# Allegro board Omni902.brd
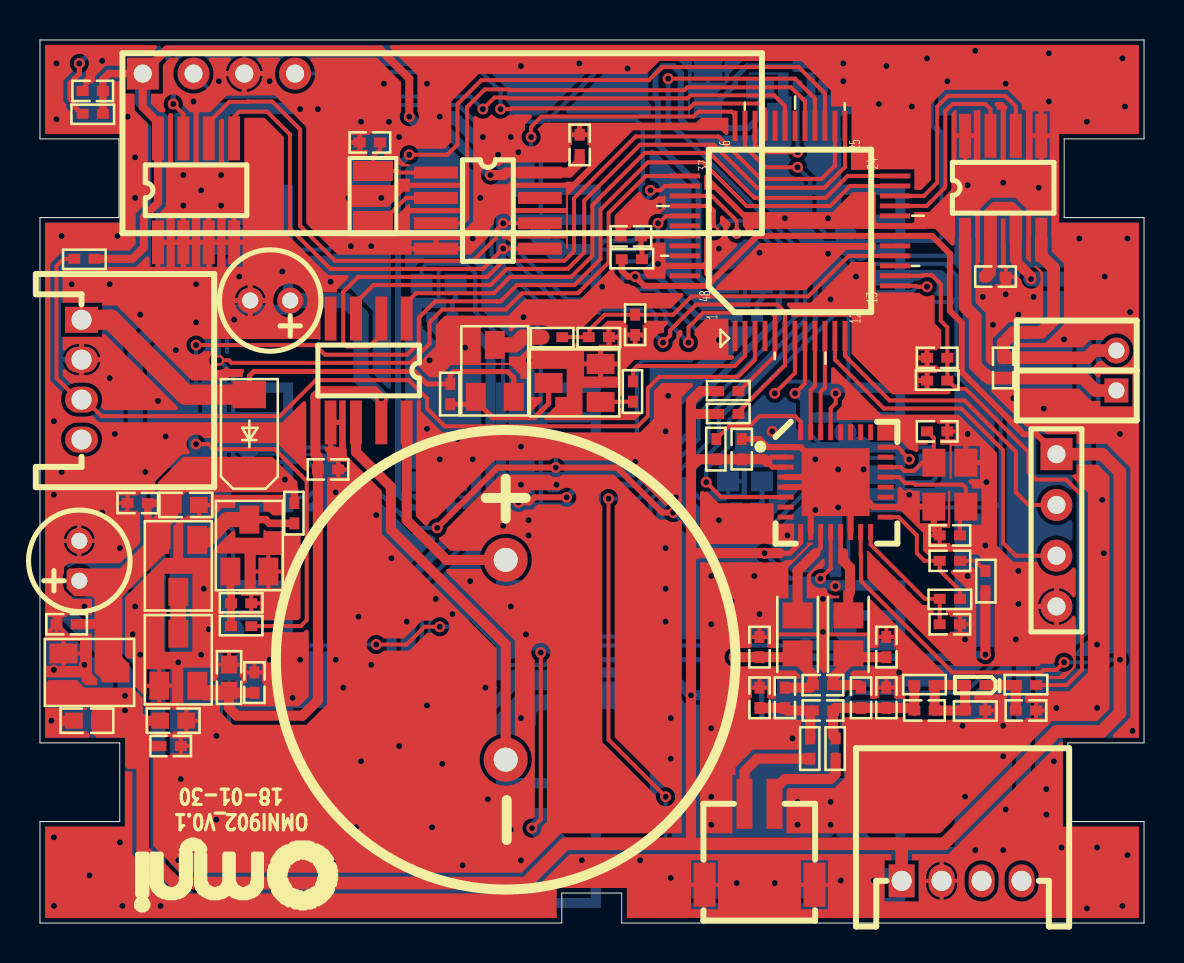
[diagram p0: board, top side]
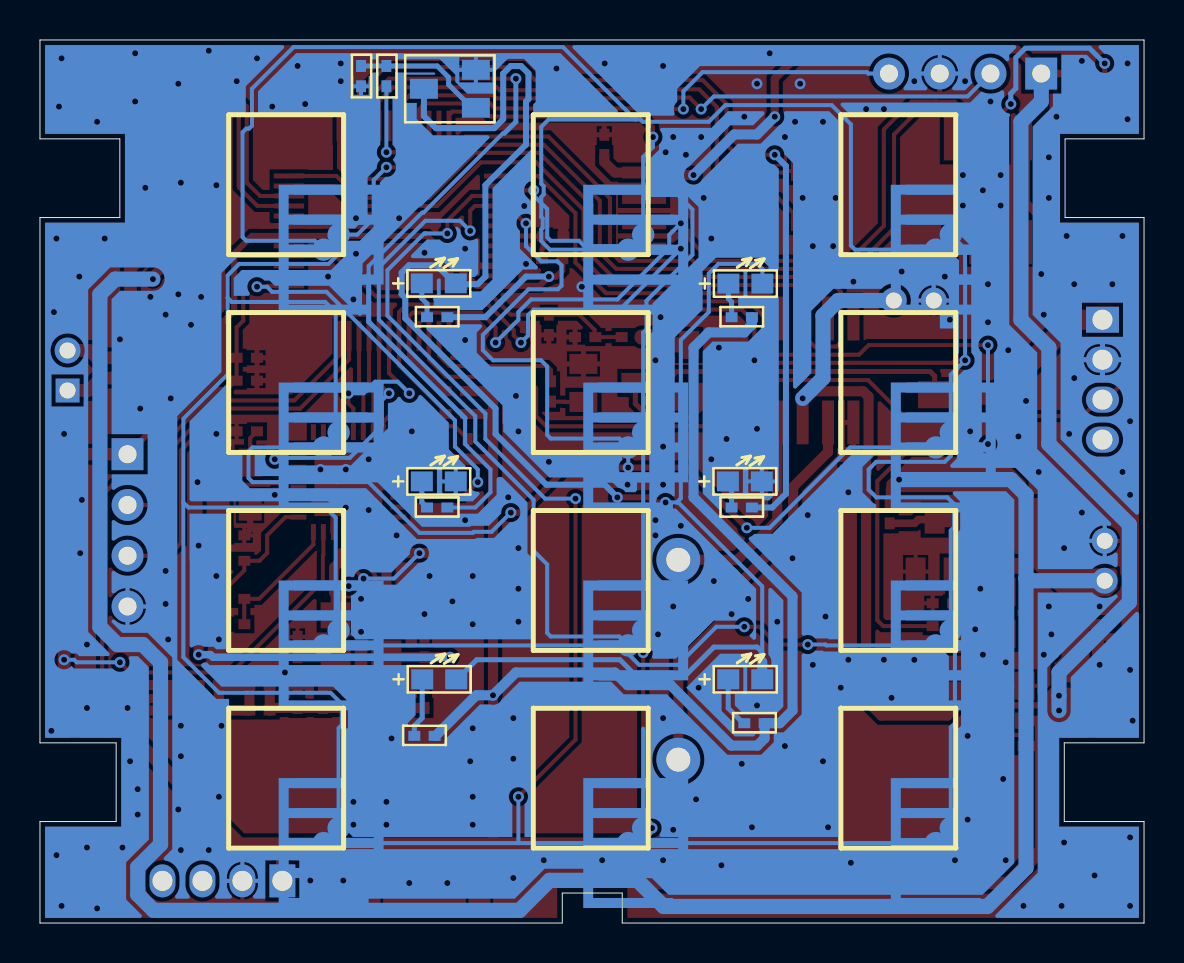
[diagram p1: board, bottom side, seen from below]

Outline 55.24 x 44.2 mm; copper layers: TOP, BOTTOM. Coordinates in mm from the lower left corner of the outline.
Outline path: 0,44.2 0,39.24 3.95,39.24 3.95,35.31 0,35.31 0,9.02 3.99,9.02 3.99,5.08 0,5.08 0,0 26.11,0 26.11,1.5 29.11,1.5 29.11,0 55.24,0 55.24,5.08 51.43,5.08 51.43,9.02 55.24,9.02 55.24,35.31 51.25,35.31 51.25,39.24 55.24,39.24 55.24,44.2 0,44.2

## Placement (name value [footprint] x y rotation side)
ANT1  470nH/LINE  [0805L]  37.91 14.45 270 top
ANT2  470nH/LINE  [0805L]  40.45 14.45 270 top
B1  Bar  [BAR]  23.3 18.18 270 top
C1  0.1uF  [0402C]  6.54 8.86 0 top
C2  100uF,  [CAP-2R0-5X11]  1.97 17.13 90 top
C3  0.1uF  [0402C]  1.33 14.95 180 top
C4  10uF  [0603C]  6.67 10.13 0 top
C5  10uF  [0603C]  2.35 10.13 180 top
C6  0.1uF  [0402C]  48.2 27.78 90 top
C7  0.1uF  [0402C]  47.82 32.35 0 top
C8  10uF  [0603C]  7.3 20.92 0 top
C9  0.1uF  [0402C]  4.89 21.02 180 top
C10  0.1uF  [0402C]  10.73 12.03 90 top
C11  10uF  [0603C]  9.46 12.29 90 top
C13  0.1uF  [0402C]  14.41 22.7 0 top
C14  100uF  [CAP-2R0-5X11]  12.52 31.16 180 top
C16  0.1uF  [0402C]  35.12 23.72 270 top
C21  1nF  [0402C]  45.53 18.13 180 top
C23  15pF  [0402C]  45.53 14.95 180 top
C25  65pF  [0402C]  37.27 11.27 90 top
C26  NC  [0402C]  36 13.81 270 top
C27  130pF  [0402C]  36 11.27 270 top
C29  227pF  [0402C]  39.18 11.91 180 top
C31  NC  [0402C]  39.18 10.64 180 top
C33  NC  [0402C]  42.35 13.81 90 top
C34  130pF  [0402C]  42.35 11.27 90 top
C36  65pF  [0402C]  41.08 11.27 90 top
C38  1nF  [0402C]  44.26 10.64 180 top
C39  NC  [0402C]  49.34 10.64 0 top
C40  10nF  [0402C]  44.89 28.29 180 top
C41  12p  [0402C]  45.53 19.4 0 top
C42  12p  [0402C]  44.89 24.61 180 top
C49  0.1uF  [0402C]  29.78 29.94 90 top
C50  0.1uF  [0402C]  2.64 41.64 180 top
C51  12pF  [0402C]  16.51 39.07 0 top
C52  0.1uF  [0402C]  27.01 38.95 90 top
C53  105  [0402C]  29.57 34.37 0 top
D1  SS34  [SMA]  10.48 24.48 90 top
D2  LED_B  [LED0603]  19.95 32 180 bottom
D3  LED_B  [LED0603]  35.29 32.01 180 bottom
D4  LED_B  [LED0603]  19.96 12.2 180 bottom
D5  LED_B  [LED0603]  35.27 12.2 180 bottom
D6  LED_B  [LED0603]  19.97 22.1 180 bottom
D7  LED_B  [LED0603]  35.29 22.1 180 bottom
D8  SS34  [0402D]  46.8 11.91 0 top
J1  CTI JTAG  [THC_4PC_2_00]  2.08 30.19 180 top
J2  SIP2  [THC-2PC-2R0]  53.86 27.65 90 top
J3  CON2_SMD_C  [SMD_2PC_1_50]  36.75 5.97 90 top
J6  CTI JTAG  [SIP-4-2R5]  50.86 23.46 270 top
J7  CTI JTAG  [THC_4PC_2_00]  43.12 2.11 270 top
K1  Key_B  [BZAJ_FZ]  41.05 23.8 90 bottom
K2  Key_B  [BZAJ_FZ]  41.05 13.9 90 bottom
K3  Key_B  [BZAJ_FZ]  41.05 4 90 bottom
K4  Key_B  [BZAJ_FZ]  41.05 33.7 90 bottom
K5  Key_B  [BZAJ_FZ]  25.81 23.8 90 bottom
K6  Key_B  [BZAJ_FZ]  25.81 13.9 90 bottom
K7  Key_B  [BZAJ_FZ]  25.81 4 90 bottom
K8  Key_B  [BZAJ_FZ]  25.81 33.7 90 bottom
K9  Key_B  [BZAJ_FZ]  10.42 23.8 90 bottom
K10  Key_B  [BZAJ_FZ]  10.42 13.9 90 bottom
K11  Key_B  [BZAJ_FZ]  10.42 4 90 bottom
K12  Key_B  [BZAJ_FZ]  10.42 33.7 90 bottom
M1  YET205A  [Y205A]  5.14 42.51 0 top
Q1  8050  [SOT23_W]  34.73 41.75 90 bottom
Q2  SI2305  [SOT23_W]  6.92 17.88 180 top
Q3  8050  [SOT23_W]  10.48 18.89 0 top
Q5  SI2305  [SOT23_W]  22.76 27.64 0 top
Q6  2N7002K  [SOT23_W]  26.75 27.03 90 top
R1  100  [0402R]  20.13 30.32 180 bottom
R2  100  [0402R]  35.37 30.32 180 bottom
R3  100  [0402R]  19.49 10 180 bottom
R4  100  [0402R]  36 9.37 180 bottom
R5  100  [0402R]  20.13 20.8 180 bottom
R6  100  [0402R]  35.37 20.8 180 bottom
R7  10k  [0402R]  37.91 42.39 270 bottom
R8  100k  [0402R]  39.18 42.39 270 bottom
R9  100k  [0402R]  12.73 20.51 90 top
R10  10k  [0402R]  10.07 14.86 0 top
R11  100k  [0402R]  10.07 16 0 top
R13  10k  [0402R]  33.85 23.72 90 top
R14  1.1K  [0402R]  45.53 16.22 180 top
R15  2.2K  [0402R]  47.31 17.11 270 top
R16  0R  [0402R]  38.54 8.73 90 top
R17  0R  [0402R]  39.81 8.73 90 top
R18  33K  [0402R]  44.26 11.91 0 top
R19  820R  [0402R]  49.34 11.91 0 top
R20  NC  [0402R]  46.8 10.64 180 top
R21  1.5K  [0402R]  44.89 27.15 0 top
R27  10k  [0402R]  25.63 29.32 180 top
R28  100k  [0402R]  20.53 26.47 90 top
R29  10k  [0402R]  29.67 26.6 90 top
R30  10k  [0402R]  27.96 29.32 180 top
R31  10k  [0402R]  2.64 40.5 180 top
R32  470R  [0402R]  29.62 33.22 0 top
R33  10k  [0402R]  34.44 26.62 0 top
R34  10k  [0402R]  34.44 25.48 0 top
R35  10k  [0402R]  2.22 33.24 180 top
U1  SC662K-3.3V  [SOT23_W]  2.48 12.54 270 top
U2  TC214B  [SO8-150]  48.2 36.8 0 top
U3  SC662K-3.3V  [SOT23_W]  6.92 13.18 0 top
U4  AK040G_SOP8  [SO8-150]  16.45 27.65 180 top
U5  NZ3801-A  [QFN32_5X5M]  37.31 23.82 0 top
U8  SN32F707B  [QFP48]  37.53 34.64 90 top
U9  AT24C64  [SO8-150]  7.81 36.67 0 top
U10  PCF8563_SOP8  [SO8-150]  22.42 35.66 270 top
X1  32768Hz  [CRY-32768-SMD]  16.66 35.14 180 top
Y1  27.12MHz  [OSC-4P-3R2X2R5-SMD]  45.53 21.94 90 top

## Library data of the parts
ANT1 ANT2 = IND_2.2uH_2.6A_10%_SMD
B1 = Bar
C1 C3 C9 C10 = CAP NP
C2 C14 = CAP_100UF_TANT_6.3V_3528-21
C4 C5 C8 C11 = C-np
C6 C7 C13 C50-C53 = CAP_0402_0.1uf_X5R_10V
C16 C21 C23 C25-C27 C29 C31 C33 C34 C36 C38-C42 C49 = CAP_0.001_X7R_50V_5%_0402
D1 D8 = SMA_SS34
D2-D7 = LED_LTST-C150GKT
J1 J6 J7 = HDR_4P
J2 = SIP2
J3 = CON2_SMD_C
K1-K12 = Key_B
M1 = YET205A
Q1 Q3 = 2N7002
Q2 Q5 = PMOS
Q6 = NMOS
R1-R11 R13-R21 R27-R35 = RES_10K_1/16W_1%_0402
U1 U3 = SC662K-3.3V
U2 = TC214B
U4 = AK040G_SOP8
U5 = NZ3801-AB
U8 = SN32F707B
U9 = AT24C64
U10 = PCF8563_SOP8
X1 = QZS32768
Y1 = xtal

## Footprints (pads in the part's own frame, mm; a bottom-side part is the same pattern mirrored in y, then rotated)
0402C
  rect 0.6x0.5 smd: 1(-0.508,0) 2(0.508,0)
0402D
  rect 0.6x0.5 smd: 1(-0.508,0) 2(0.508,0)
0402R
  rect 0.6x0.5 smd: 1(-0.508,0) 2(0.508,0)
0603C
  rect 0.89x0.81 smd: 1(-0.65,0) 2(0.65,0)
0805L
  rect 1.3x1.5 smd: 1(-0.95,0) 2(0.95,0)
BAR
  round 2.2 hole 1.2: 1(0,0) 2(10,0)
BZAJ_FZ
  custom 6.5x4.5 smd: 1(0,0)
  custom 5x4.5 smd: 2(0.75,-0.75)
CAP-2R0-5X11
  round 1.3 hole 0.8: 1(0,0) 2(2,0)
CRY-32768-SMD
  rect 2x1 smd: 1(0,0) 2(0,-2.5)
LED0603
  rect 1.1x1 smd: 1(-0.85,0) 2(0.85,0)
OSC-4P-3R2X2R5-SMD
  rect 1.4x1.15 smd: 1(-1.1,-0.8) 2(1.1,-0.8) 3(1.1,0.8) 4(-1.1,0.8)
QFN32_5X5M
  rect 0.8x0.25 smd: 1(0,0) 2(0,-0.5) 3(0,-1) 4(0,-1.5) 5(0,-2) 6(0,-2.5) 7(0,-3) 8(0,-3.5) 17(5,-3.5) 18(5,-3) 19(5,-2.5) 20(5,-2) 21(5,-1.5) 22(5,-1) 23(5,-0.5) 24(5,0)
  rect 0.25x0.8 smd: 9(0.75,-4.25) 10(1.25,-4.25) 11(1.75,-4.25) 12(2.25,-4.25) 13(2.75,-4.25) 14(3.25,-4.25) 15(3.75,-4.25) 16(4.25,-4.25) 25(4.25,0.75) 26(3.75,0.75) 27(3.25,0.75) 28(2.75,0.75) 29(2.25,0.75) 30(1.75,0.75) 31(1.25,0.75) 32(0.75,0.75)
  rect 3.4x3.4 smd: 33(2.5,-1.75)
QFP48
  rect 1.52x0.25 smd: 1(-5.26,2.75) 2(-5.26,2.25) 3(-5.26,1.75) 4(-5.26,1.25) 5(-5.26,0.75) 6(-5.26,0.25) 7(-5.26,-0.25) 8(-5.26,-0.75) 9(-5.26,-1.25) 10(-5.26,-1.75) 11(-5.26,-2.25) 12(-5.26,-2.75) 25(5.26,-2.75) 26(5.26,-2.25) 27(5.26,-1.75) 28(5.26,-1.25) 29(5.26,-0.75) 30(5.26,-0.25) 31(5.26,0.25) 32(5.26,0.75) 33(5.26,1.25) 34(5.26,1.75) 35(5.26,2.25) 36(5.26,2.75)
  rect 0.25x1.52 smd: 13(-2.75,-5.26) 14(-2.25,-5.26) 15(-1.75,-5.26) 16(-1.25,-5.26) 17(-0.75,-5.26) 18(-0.25,-5.26) 19(0.25,-5.26) 20(0.75,-5.26) 21(1.25,-5.26) 22(1.75,-5.26) 23(2.25,-5.26) 24(2.75,-5.26) 37(2.75,5.26) 38(2.25,5.26) 39(1.75,5.26) 40(1.25,5.26) 41(0.75,5.26) 42(0.25,5.26) 43(-0.25,5.26) 44(-0.75,5.26) 45(-1.25,5.26) 46(-1.75,5.26) 47(-2.25,5.26) 48(-2.75,5.26)
SIP-4-2R5
  rect 1.6x1.6 hole 0.9: 1(0,0)
  round 1.6 hole 0.9: 2(2.54,0) 3(5.08,0) 4(7.62,0)
SMA
  rect 1.36x1.67 smd: 1(1.965,0) 2(-1.965,0)
SMD_2PC_1_50
  rect 2.5x0.8 smd: 1(0,0) 2(0,1.5)
  rect 2.2x1.1 smd: 3(-4.05,-2) 4(-4.05,3.5)
SO8-150
  rect 0.6x2.2 smd: 1(-1.905,-2.6) 2(-0.635,-2.6) 3(0.635,-2.6) 4(1.905,-2.6) 5(1.905,2.6) 6(0.635,2.6) 7(-0.635,2.6) 8(-1.905,2.6)
SOT23_W
  rect 1x1.4 smd: 1(-0.95,-1.3) 2(0.95,-1.3) 3(0,1.3)
THC-2PC-2R0
  rect 1.2x1.2 hole 0.8: 1(-1,0)
  round 1.3 hole 0.8: 2(1,0)
THC_4PC_2_00
  rect 1.65x1.3 hole 1: 1(0,0)
  oval 1.65x1.3 hole 1: 2(0,2) 3(0,4) 4(0,6)
Y205A
  rect 1.6x1.6 hole 0.9: 1(0,0)
  round 1.6 hole 0.9: 2(2.54,0) 3(5.08,0) 4(7.62,0)

## Nets
3V3_VC: C10.1 C11.1 C13.1 C14.1 U3.2(OUT) U4.7(VDD)
+3.3V: C1.1 C4.1 C5.1 C16.2 C50.1 C52.1 J6.1 J7.1 M1.1(VCC) R1.2 R2.2 R3.2 R4.2 R13.1 R31.1 R32.1 R33.1 R34.1 R35.1 U1.2(OUT) U5.2(PVDD) U5.3(DVDD) U5.9(SVDD) U5.12(TVDD) U5.15(AVDD) U8.18(AVDD) U8.48(VDD) U9.8(VCC) U10.8(VDD)
GND: C1.2 C2.2 C3.2 C4.2 C5.2 C7.2 C8.2 C9.2 C10.2 C11.2 C13.2 C14.2 C16.1 C23.1 C26.1 C27.1 C33.2 C34.2 C39.2 C40.2 C41.1 C42.1 C49.1 C50.2 C51.1 C52.2 C53.1 D6.2(K) D7.2(K) J1.2 J3.3 J3.4 J6.4 J7.2 M1.3(GND) Q1.2(SOURCE) Q3.2(SOURCE) Q6.2(SOURCE) R8.2 R11.2 R20.1 R21.1 R30.1 U1.1(GND) U2.5(GND1) U2.8(GND2) U3.1(GND) U4.5(VSS) U5.1(I2C) U5.4(DVSS) U5.5(PVSS) U5.10(TVSS1) U5.14(TVSS2) U5.18(AVSS) U5.33(GND) U8.19(AVSS) U8.46(VSS) U9.1(A0) U9.2(A1) U9.3(A2) U9.4(VSS) U10.4(VSS) Y1.2 Y1.4
VBAT: D1.1 J1.1 Q5.2(SOURCE) R28.2
VCC: C2.1 C3.1 C7.1 C8.1 C9.1 D1.2 Q2.2(SOURCE) R9.2 U1.3(VDD) U2.2(VCC1) U2.3(VCC2)
13.56MH+: J3.2 R16.1
13.56MH-: J3.1 R17.1
BACKLIGHTCTR: R7.2 U8.34(P1.9/CT16B1_PWM0)
BAR_N: B1.2 U4.6(PWM1)
BAR_P: B1.1 U4.8(PWM2)
BAT_VAL: C49.2 R27.1 R30.2 U8.16(P2.3/AIN3/CM1N)
BAVO: R29.2 U8.2(P0.1/UTXD1)
H1: K4.1 K8.1 K12.1 U8.38(P3.1)
H2: K3.1 K7.1 K11.1 U8.39(P3.2)
H3: K2.1 K6.1 K10.1 U8.40(P3.3)
H4: K1.1 K5.1 K9.1 U8.41(P3.4/LXTALIN)
IIC_SCL: R33.2 U8.5(P0.4/SCL0) U9.6(SCL) U10.6(SCL)
IIC_SDA: R34.2 U8.6(P0.5/SDA0) U9.5(SDA) U10.5(SDA)
L1: K1.2 K2.2 K3.2 K4.2 U8.35(P1.10/CT16B1_PWM1)
L2: K5.2 K6.2 K7.2 K8.2 U8.36(P1.11/CLKOUT)
L3: K9.2 K10.2 K11.2 K12.2 U8.37(P3.0)
LEDG: R6.2 U8.28(P1.3/CT16B2_PWM1N)
LEDR: R5.2 U8.27(P1.2/CT16B2_PWM1)
MMCU_UP: U8.30(P1.5)
MOTOL: U2.6(INA) U8.22(P2.7/AIN7)
MOTOR: U2.7(INB) U8.21(P2.6/AIN6)
P0.0: U8.1(P0.0/URXD1)
P1.4: U8.29(P1.4/CT16B2_CAP0/DPDWAKEUP) U10.3(INT)
P2.4: U8.17(P2.4/AIN4/CM1P)
P2.5: U8.20(P2.5/AIN5)
P3.5: U8.42(P3.5/LXALOUT)
P3.6: C53.2 R32.2 U8.43(P3.6/RESET)
P3.7: U8.44(P3.7/XTALIN)
P3.8: U8.45(P3.8/XTALOUT)
P3.9: U8.47(P3.9/CT16B2_PWM3N/CM1O)
RCARD_ADCN: C40.1 R19.2 R21.2 U8.14(P2.1/AIN1/CM0N)
RCARD_ADCO: U8.4(P0.3/CT16B2_PWM2N/CM0O)
RCARD_ADCP: U8.15(P2.2/AIN2/CM0P)
RCARD_CS: U5.24(SDA/NSS/URX) U8.8(P0.7/SEL0)
RCARD_RST: U5.6(NRSTPD) U8.13(P2.0/AIN0)
RF_PWR: J7.3 M1.4(CE) U8.33(P1.8/CT16B1_CAP0)
RF_TX: J7.4 M1.2(DO) U8.31(P1.6/URXD0/CT16B2_PWM2)
SET_KEY: J1.3 R35.2 U8.3(P0.2/CT16B0_CAP0)
SPI_MISO: U5.31(D7/MISO/SCL/UTX) U8.9(P0.8/MISO0/CT16B0_PWM0)
SPI_MOSI: U5.30(D6/MOSI/ADR0/MX) U8.10(P0.9/MOSI0/CT16B0_PWM1)
SPI_SCK: U5.29(D5/SCK/ADR1/DTRQ) U8.7(P0.6/SCK0)
SWCLK: J6.3 U8.11(P0.10/SWCLK/CT16B0_PWM2)
SWDIO: J6.2 U8.12(P0.11/SWDIO)
UTXD0: U8.32(P1.7/UTXD0/CT16B2_PWM3)
VC_BS_SIG: U4.3(TG3) U8.25(P1.0/CT16B2_PWM0N)
VC_CT_RST: U4.2(TG1) U8.26(P1.1/CT16B2_PWM0)
VC_CT_SIG: U4.1(TG2/RST) U8.24(P2.9/AIN9)
VOC_BAT: Q2.3(DRAIN) U3.3(VDD)
VOC_PWR_ON: R10.2 U8.23(P2.8/AIN8)
N452386: C38.1 D8.1 R18.2 R20.2
N452418: C31.1 C34.1 C36.1 C38.2 R17.2 R18.1
N452474: C39.1 D8.2 R19.1
N452564: ANT2.2 C29.1 C33.1 C36.2
N452690: C41.2 U5.21(OSCIN) Y1.1
N452714: C42.2 U5.22(OSCOUT) Y1.3
N453184: C21.2 R14.1 U5.17(RX)
N453208: C21.1 R15.1
N453216: C23.2 R14.2 U5.16(VMID)
N453232: ANT1.2 C25.2 C26.2 C29.2 R15.2
N453248: ANT1.1 U5.11(TX1)
N453252: C25.1 C27.2 C31.2 R16.2
N453288: ANT2.1 U5.13(TX2)
N458659: D4.1(A) R3.1
N458663: D3.1(A) R2.1
N458667: D2.1(A) R1.1
N458671: D2.2(K) D3.2(K) D4.2(K) D5.2(K) Q1.3(DRAIN)
N458703: D5.1(A) R4.1
N554836: Q5.1(GATE) Q6.3(DRAIN) R28.1
N554996: Q6.1(GATE) R29.1
N555000: Q5.3(DRAIN) R27.2
N555502: C6.2 J2.2 U2.4(OUTB)
N555506: C6.1 J2.1 U2.1(OUTA)
N555509: Q2.1(GATE) Q3.3(DRAIN) R9.1
N555513: Q3.1(GATE) R10.1 R11.1
N555834: Q1.1(GATE) R7.1 R8.1
N556154: D6.1(A) R5.1
N556230: D7.1(A) R6.1
N556926: R13.2 U5.32(EA)
N559129: C51.2 U10.1(OSCI) X1.2
N559153: U10.2(OSCO) X1.1
N566757: R31.2 U9.7(W\P\)
N569547: J1.4

Pads without a net: U4 4; U5 7 8 19 20 23 25 26 27 28; U10 7

## Via types
v1: diameter 0.55, hole 0.3, TOP to BOTTOM, 290 vias

## Routing (per net, layer and track width the routed paths; a pad name or vN(x,y) marks a point on that pad's centre or on a via; arc(x,y) is an arc through that point)
3V3_VC: length 37.3
  TOP w0.508: 10.73,11.53 9.57,11.53 C11.1 9.46,10.76 9.84,10.38 13.14,10.38 13.91,11.14 C13.1 13.91,23.33 13.78,23.45 13.78,26.34 14.05,26.61 16.73,26.61 v1(17.08,26.26) U4.7
  TOP w0.762: C11.1 9.35,11.53 8.22,11.53 U3.2
  BOTTOM w0.762: C14.1 15.3,31.16 16.07,30.39 16.07,27.27 v1(17.08,26.26)
+3.3V: length 301.7
  TOP w0.203: U5.15 41.06,18.43 41.09,18.41 41.09,17.11 45.66,12.54 50.1,12.54 50.22,12.67 50.86,12.67 v1(51.24,13.05) ; v1(39.05,17.24) 39.56,17.75 U5.12
  TOP w0.254: 37.02,18.51 37.53,18.51 38.06,19.05 U5.9 ; U5.2 36.62,23.32 36.39,23.08 36.65,22.82 U5.3
  TOP w0.305: J6.1 49.87,24.46 49.23,24.46 46.13,27.57 46.13,30.04 45.53,30.64 45.53,33.5 44.64,34.39 U8.18 35.88,34.39 33.38,31.89 U8.48 30.25,31.89 v1(29.78,32.35) 29.41,32.35 29.11,32.66 R32.1
  TOP w0.381: R31.1 C50.1 3.15,42.21 3.45,42.51 M1.1
  TOP w0.406: R35.1 4.64,33.24 5.2,33.81 5.2,35.34 5.91,36.05 5.91,40.07 5.14,40.83 M1.1 6.35,43.72 17.02,43.72 18.48,42.26 v1(18.48,40.35)
  TOP w0.508: 32.45,3.97 32.58,4.1 v1(32.58,11.4) 32.58,18.26 ; C52.1 27.01,38.09 26.48,37.56 U10.8 23.33,37.56 23.2,37.43 v1(22.54,37.43) ; 37.02,18.51 v1(36.26,18.51) 32.83,18.51 32.58,18.26 ; 32.58,25.37 32.58,22.83 ; 32.58,25.37 32.58,26.13 33.06,26.62 R33.1 ; 32.58,25.37 32.68,25.48 R34.1 ; 32.58,22.83 32.58,18.26 ; 32.58,22.83 32.96,23.21 R13.1 C16.2 36.26,23.21 36.39,23.08 ; C1.1 5.27,8.86 ; C4.1 5.14,10.13
  TOP w0.635: 42.86,3.97 26.29,3.97 24.32,2 6.79,2 5.14,3.65 5.14,10.13 ; 42.86,3.97 43.12,3.72 J7.1 ; 42.86,3.97 45.24,3.97 50.86,9.59 53.12,9.59 54.04,10.51 v1(54.04,13.18) 54.04,22.57 53.15,23.46 J6.1
  BOTTOM w0.203: v1(36.26,18.51) 37.53,17.24 v1(39.05,17.24) ; v1(54.04,13.18) 53.53,13.18 53.41,13.05 v1(51.24,13.05)
  BOTTOM w0.305: v1(29.78,32.35) 30.92,32.35 32.96,30.32 R2.2
  BOTTOM w0.508: R1.2 19.62,29.94 20,29.56 21.78,29.56 22.54,28.8 22.54,21.3 17.59,16.35 17.59,10.64 18.22,10 R3.2 18.99,9.24 19.35,8.88 20.66,8.88 23.69,11.91 25.84,11.91 26.48,12.54 31.43,12.54 v1(32.58,11.4) 33.41,11.4 35.45,9.37 R4.2 ; v1(22.54,37.43) 20.51,39.47 19.37,39.47 v1(18.48,40.35) ; 43.12,2.29 J7.1
  BOTTOM w0.762: M1.1 5.14,41.12 6.16,40.1 6.16,30.19 4.76,28.8 4.76,23.97 0.73,19.94 0.73,16.06 4.25,12.54 v1(4.25,11.38) v1(4.25,10.64)
GND: length 164.1
  TOP w0.203: 2.48,42.13 2.13,41.79 C50.2 ; 48.32,32.78 C7.2 48.8,32.35 ; 0.83,14.53 C3.2 ; C3.2 0.44,14.57 ; C3.2 0.83,15.08 ; C3.2 1.21,14.57 ; C39.2 49.85,11.06 ; C39.2 49.85,10.21 ; C39.2 50.33,10.64 ; 0.83,15.21 0.83,15.38 ; 0.83,15.21 0.57,15.46 ; 0.83,15.21 0.83,15.08 ; Q3.2 11.43,18.47 ; Q3.2 11.43,16.71 ; Q3.2 12.11,17.59 ; Q3.2 10.75,17.59 ; C11.2 10.04,12.94 ; C11.2 8.88,12.94 ; C11.2 9.46,13.56 ; 41.93,14.32 C33.2 ; C33.2 42.78,14.32 ; C33.2 42.35,14.8 ; 7.05,8.43 C1.2 ; C1.2 7.53,8.86 ; C1.2 7.05,9.29 ; C27.1 36,12.26 ; C27.1 36.43,11.78 ; C27.1 35.58,11.78 ; C4.2 7.94,10.13 ; C4.2 7.32,9.55 ; C4.2 7.32,10.71 ; C34.2 42.78,11.78 ; C34.2 42.35,12.26 ; C34.2 41.93,11.78 ; 38.03,1.92 J3.3 ; J3.3 38.75,0.64 ; J3.3 39.48,1.92 ; J3.3 38.75,3.19 ; R20.1 47.79,10.64 ; R20.1 47.31,11.06 ; R20.1 47.31,10.21 ; U3.1 6.65,11.88 ; U3.1 5.29,11.88 ; U3.1 5.97,11 ; U3.1 5.97,12.75 ; U1.1 2.05,13.49 ; U1.1 1.18,12.81 ; U1.1 1.18,14.17 ; J3.4 33.98,1.92 ; J3.4 33.25,3.19 ; J3.4 33.25,0.64 ; J3.4 32.53,1.92 ; J7.2 45.12,3.11 ; J7.2 45.12,1.11 ; J7.2 45.94,2.11 ; J7.2 44.29,2.11 ; C41.1 45.02,19.83 ; C41.1 45.02,18.97 ; C41.1 44.54,19.4 ; 14.92,22.27 C13.2 ; C13.2 14.92,23.13 ; C13.2 15.4,22.7 ; R11.2 11.05,16 ; R11.2 10.57,15.57 ; R11.2 10.57,16.43 ; 41.72,20.82 41.65,20.82 40.66,21.81 40.07,21.81 ; 8.58,20.92 C8.2 7.95,20.34 ; 10.3,12.54 C10.2 ; C10.2 11.16,12.54 ; C10.2 10.73,13.02 ; C42.1 45.88,24.61 ; C42.1 45.4,25.03 ; C42.1 45.4,24.18 ; 46.04,14.53 C23.1 ; C23.1 46.52,14.95 ; C23.1 46.04,15.38 ; 0.83,15.08 1.08,15.34 ; 35.58,14.32 C26.1 ; C26.1 36,14.8 ; C26.1 36.43,14.32 ; C2.2 3.22,19.13 3.24,19.15 ; C2.2 1.14,19.13 ; C2.2 1.97,19.96 ; C2.2 1.97,18.13 ; 39.23,21.48 39.17,21.43 38.97,21.43 38.56,21.02 ; C9.2 4.39,21.45 ; C9.2 4.39,20.59 ; C9.2 3.91,21.02
  TOP w0.254: U10.4 18.54,33.75 ; U10.4 21.09,33.75 ; U10.4 19.82,34.23 ; M1.3 9.08,42.51 ; M1.3 11.24,42.51 11.37,42.64 ; M1.3 10.22,41.54 ; 50.1,39.4 50.1,38.12 ; 50.1,39.4 50.58,39.4 ; 50.1,39.4 50.1,40.68 ; 50.1,39.4 49.62,39.4 ; R30.1 28.47,29.75 ; R30.1 28.47,28.9 ; R30.1 28.95,29.32 ; 8.45,34.07 8.45,35.35 ; 8.45,34.07 8.92,34.07 ; 8.45,34.07 8.45,32.61 ; 8.45,34.07 7.97,34.07 ; C49.1 30.21,29.43 ; C49.1 29.35,29.43 ; C49.1 29.78,28.95 ; U2.8 46.77,39.4 ; U2.8 46.29,38.12 ; U2.8 45.81,39.4 ; C40.2 44.39,28.72 ; C40.2 43.91,28.29 ; C40.2 44.39,27.86 ; 7.18,35.53 U9.2 ; U9.2 7.18,32.61 ; U9.2 7.65,34.07 ; U9.2 6.47,34.07 ; C51.1 15.52,39.07 ; C51.1 16,39.49 ; C51.1 16,38.64 ; U9.4 10.19,34.07 ; U9.4 9.72,32.79 ; U9.4 9.72,35.35 ; U9.4 9.24,34.07 ; C14.2 9.69,31.16 ; C14.2 11.35,31.16 ; C14.2 10.52,31.98 ; C14.2 10.52,30.33 ; R21.1 44.39,26.72 ; R21.1 43.91,27.15 ; R21.1 44.39,27.57 ; 50.86,15.84 50.86,16.82 ; 50.86,15.84 49.89,15.84 ; 50.86,15.84 50.86,14.87 ; Q6.2 28.05,27.3 ; Q6.2 28.05,28.66 ; Q6.2 28.93,27.98 ; Q6.2 27.17,27.98 ; 15.02,25.05 U4.5 14.54,23.78 ; 27.5,39.47 27.48,39.45 C52.2 ; C52.2 27.01,39.93 ; C52.2 26.58,39.45 ; 46.33,23.92 Y1.2 47.08,23.04 ; 6.47,34.07 5.91,34.07 5.91,32.35 ; 6.47,34.07 6.54,34 ; J1.2 2.08,27.37 ; J1.2 2.08,29.02 ; J1.2 3.08,28.19 ; 41.6,34.89 41.59,34.89
  TOP w0.279: 41.21,34.89 41.22,34.89 U8.19 44.26,34.89 44.26,34.89
  TOP w0.305: 39.56,22.32 U5.33 ; 39.56,22.32 39.35,22.53 39.35,23.19 39.03,23.51 38.37,23.51 38.07,23.81 37.79,23.81 37.79,23.82 U5.1 36.41,23.82 36,24.23 35.12,24.23 ; 39.56,22.32 U5.4 ; U5.33 40.02,21.86 ; U5.33 39.56,21.82 ; 40.02,21.86 40.56,21.32 U5.14 ; 40.02,21.86 40.68,21.86 41.72,20.82 U5.18 43.85,20.82 43.87,20.84 Y1.4 44.73,19.69 C41.1 ; 39.56,21.82 39.23,21.48 38.95,21.48 38.56,21.09 U5.10 ; 39.56,21.82 U5.5 ; v1(30.92,32.99) 31.02,32.89 U8.46 33.24,32.89 33.34,32.99
  TOP w0.508: C5.2 v1(0.57,10.13) ; v1(31.01,35.89) 29.89,35.89 29.06,35.06 C53.1 ; C7.2 v1(48.32,31.46)
  BOTTOM w0.203: M1.3 11.2,42.51 ; M1.3 10.22,43.49 ; M1.3 9.25,42.51 ; D7.2 35.16,22.1 ; D7.2 34.44,21.42 ; D7.2 34.44,22.78 ; 32.56,42.7 Q1.2 ; Q1.2 34.31,42.7 ; Q1.2 33.43,43.38 ; Q1.2 33.43,42.02 ; D6.2 19.85,22.1 ; D6.2 19.12,21.42 ; D6.2 18.4,22.1 ; D6.2 19.12,22.78 ; C14.2 10.52,31.98 ; C14.2 11.35,31.16 ; C14.2 9.69,31.16 ; 44.29,2.11 J7.2 ; J7.2 45.94,2.11 ; J7.2 45.12,3.11 ; C2.2 1.97,19.96 ; C2.2 2.8,19.13 ; C2.2 1.97,18.3 ; 39.18,41.4 R8.2 ; R8.2 39.61,41.88 ; R8.2 38.75,41.88 ; 50.86,14.87 50.86,15.84 ; 50.86,15.84 50.86,16.82 ; 50.86,15.84 49.89,15.84
  BOTTOM w0.254: J1.2 2.08,27.37 ; J1.2 3.08,28.19 ; J1.2 2.08,29.02 ; J1.2 1.08,28.19
  vias: v1(0.7,25.11) v1(0.7,21.43) v1(0.7,12.67) v1(0.7,4.29) v1(0.7,0.86) v1(0.83,43.02) v1(0.83,40.23) v1(1.08,34.39) v1(1.08,22.57) v1(1.59,31.97) v1(2.22,15.84) v1(2.22,12.92) v1(2.48,2.38) v1(3.11,43.15) v1(3.11,20.54) v1(3.49,31.97) v1(3.49,27.27) v1(3.75,24.48) v1(3.87,34.39) v1(4,18.76) v1(4,4.03) v1(4.13,0.86) v1(4.38,40.35) v1(4.64,14.45) v1(4.76,38.32) v1(4.76,36.29) v1(4.76,15.84) v1(5.02,30.45) v1(5.02,13.43) v1(5.14,32.48) v1(5.27,22.57) v1(5.91,26.13) v1(6.03,0.86) v1(6.29,24.35) v1(6.79,28.67) v1(6.92,13.05) v1(6.92,3.14) v1(7.05,7.21) v1(7.18,37.43) v1(7.18,35.91) v1(7.68,41.12) v1(7.81,31.97) v1(7.81,30.07) v1(8.06,36.67) v1(8.06,13.43) v1(8.19,16.73) v1(8.45,14.7) v1(8.7,24.61) v1(8.83,9.37) v1(8.83,5.18) v1(8.95,42.13) v1(9.06,37.43) v1(9.06,35.91) v1(9.46,3.14) v1(9.72,30.19) v1(9.97,32.35) v1(11.49,42.13) v1(11.49,13.18) v1(12.13,32.61) v1(12.64,11.27) v1(13.02,40.74) v1(13.02,13.18) v1(13.91,40.74) v1(14.54,32.1) v1(14.67,3.02) v1(14.8,21.56) v1(14.8,13.18) v1(15.18,11.78) v1(15.43,36.29) v1(15.56,33.88) v1(15.81,4.79) v1(15.94,15.34) v1(16.07,40.1) v1(16.07,8.1) v1(16.57,33.88) v1(16.57,12.92) v1(16.83,20.42) v1(17.08,36.29) v1(17.21,42.01) v1(17.46,40.1) v1(17.59,18.26) v1(17.97,39.34) v1(17.97,8.86) v1(18.35,15.08) v1(18.73,43.53) v1(19.37,42.01) v1(19.37,24.73) v1(19.37,10.89) v1(19.49,28.16) v1(19.62,4.79) v1(19.81,16.22) v1(20,40.35) v1(20,23.21) v1(20.13,7.97) v1(20.64,15.46) v1(20.89,24.23) v1(21.15,2.89) v1(21.27,28.8) v1(21.53,17.11) v1(21.65,34.26) v1(21.65,23.21) v1(22.03,36.29) v1(22.16,39.34) v1(22.29,11.78) v1(22.42,6.19) v1(22.92,38.45) v1(23.18,19.88) v1(23.56,39.34) v1(23.56,15.84) v1(23.56,4.67) v1(23.94,38.58) v1(24.07,42.89) v1(24.07,23.84) v1(24.07,21.94) v1(24.07,10.26) v1(24.07,3.14) v1(24.19,30.32) v1(24.32,14.45) v1(24.45,28.16) v1(24.45,20.16) v1(24.45,19.4) v1(25.84,21.94) v1(26.99,43.02) v1(27.11,3.14) v1(28.13,31.85) v1(29.4,42.77) v1(29.78,23.08) v1(30.04,3.14) v1(31.31,24.61) v1(31.31,18.76) v1(31.31,16.73) v1(31.31,15.08) v1(31.43,26.38) v1(31.56,10.26) v1(31.56,8.22) v1(31.56,2.25) v1(31.81,21.3) v1(33.59,17.37) v1(33.59,14.95) v1(33.59,9.75) v1(33.59,6.32) v1(33.59,4.92) v1(33.72,8.1) v1(33.97,33.75) v1(33.97,29.18) v1(33.97,20.16) v1(34.61,16.1) v1(34.86,2) v1(35.75,17.37) v1(36,33.55) v1(36,15.46) v1(36.64,24.61) v1(36.77,2) v1(37.27,35.27) v1(37.4,19.4) v1(37.66,9.24) v1(37.91,6.06) v1(37.91,4.92) v1(38.8,23.21) v1(38.8,20.67) v1(39.18,16.22) v1(39.18,14.57) v1(39.43,35.27) v1(39.43,33.5) v1(39.56,31.21) v1(39.56,6.06) v1(39.56,4.92) v1(39.94,22.7) v1(39.94,20.8) v1(40.07,2.13) v1(40.2,43.02) v1(40.2,42.13) v1(40.83,32.35) v1(41.21,22.7) v1(41.72,2.13) v1(41.97,40.99) v1(42.35,42.89) v1(42.99,12.54) v1(43.5,21.43) v1(43.62,40.86) v1(44.39,43.28) v1(45.4,42.13) v1(46.16,9.87) v1(46.29,14.19) v1(46.29,6.32) v1(46.42,36.93) v1(46.42,24.48) v1(46.42,17.37) v1(46.8,43.66) v1(46.8,3.65) v1(47.18,31.34) v1(47.36,22.07) v1(47.31,18.89) v1(47.69,29.94) v1(48.2,37.05) v1(48.2,9.87) v1(48.2,8.35) v1(48.2,3.65) v1(48.32,42.01) v1(48.32,5.68) v1(48.7,26.26) v1(48.83,14.19) v1(48.96,30.45) v1(48.96,17.62) v1(48.96,15.97) v1(49.72,31.34) v1(49.97,36.8) v1(50.23,25.75) v1(50.36,6.7) v1(50.36,5.43) v1(50.48,43.53) v1(50.48,41.12) v1(50.74,8.1) v1(50.86,10.76) v1(51.12,3.78) v1(51.24,29.21) v1(52.01,34.26) v1(52.39,40.1) v1(52.39,0.73) v1(52.9,13.94) v1(52.9,10.76) v1(52.9,3.78) v1(53.15,21.18) v1(53.23,18.51) v1(53.28,32.35) v1(54.04,24.48) v1(54.17,43.28) v1(54.17,0.86) v1(54.29,40.86) v1(54.42,34.26) v1(54.42,3.4) v1(54.55,30.58) v1(54.67,9.62)
VBAT: length 26.1
  TOP w0.254: Q5.2 23.71,27.29 23.4,27.6 20.71,27.6 20.53,27.42 R28.2 19.35,26.98 18.73,27.6 10.7,27.6 10.48,27.38 D1.1
  TOP w1.016: J1.1 3.54,30.19 7.29,26.44 D1.1
VCC: length 124.5
  TOP w0.381: 5.4,19.91 5.4,19.91 C9.1 6.56,21.02 C8.1 ; 12.51,21.94 12.73,21.72 R9.2
  TOP w0.508: U2.3 48.83,33.12 49.59,32.35 v1(49.59,32.23) ; C3.1 2.98,14.95
  TOP w0.635: U2.3 48.83,35.53 48.58,35.78 47.82,35.78 47.56,35.53 47.56,32.88 47.5,32.82 47.5,32.55 C7.1
  BOTTOM w0.762: 5.91,17.24 5.79,17.13 C2.1 ; 5.91,17.24 5.91,21.43 6.67,22.19 v1(12.26,22.19) ; 5.91,17.24 5.91,2.76 7.84,0.83 24.04,0.83 25.34,2.13 29.75,2.13 31.24,0.63 49.56,0.63 50.35,1.43 50.35,2.8 49.21,3.94 49.21,13.05 50.1,13.94 51.37,13.94 52.25,14.81 52.25,31.46 51.49,32.23 v1(49.59,32.23)
13.56MH+: length 5.2
  TOP w0.508: J3.2 35.25,7.6 35.88,8.22 R16.1
13.56MH-: length 4.9
  TOP w0.508: J3.1 36.75,6.69 37.27,7.21 39.56,7.21 39.81,7.46 R17.1
BACKLIGHTCTR: length 6.6
  TOP w0.203: U8.34 35.78,38.93 36.13,38.58 v1(37.91,38.58)
  BOTTOM w0.203: v1(37.91,38.58) R7.2
BAR_N: length 20
  TOP w0.508: B1.2 23.3,13.94 17.56,19.68 17.56,21.83 15.81,23.57 U4.6
BAR_P: length 10.7
  TOP w0.508: U4.8 18.35,20.16 20.34,18.18 B1.1
BAT_VAL: length 18.5
  TOP w0.203: R27.1 R30.2 27.5,29.36 27.5,29.69 28.26,30.45 C49.2 31.69,30.45 32.6,31.36 38.44,31.36 40.47,33.39 U8.16
BAVO: length 7.5
  TOP w0.203: R29.2 29.67,27.67 29.88,27.88 34.77,27.88 35.28,28.39 U8.2
H1: length 79.6
  TOP w0.203: v1(30.54,36.67) 31.05,36.67 31.26,36.89 U8.38
  BOTTOM w0.203: v1(30.54,36.67) 30.54,36.42 29.87,35.74 29.87,34.33 29.69,34.15 28.27,34.15 28,33.88 25.99,33.88 K8.1 29.73,33.7 30.16,34.13 30.16,34.71 30.09,34.78 30.09,35.26 30.16,35.33 30.16,36.34 30.04,36.46 30.04,36.88 30.16,37 30.16,39.85 29.8,40.21 25.45,40.21 ; K12.1 14.47,33.7 14.67,33.91 14.67,39.97 15.63,40.93 20.95,40.93 21.78,40.1 25.08,40.1 25.19,40.21 25.45,40.21 ; K4.1 41.5,34.15 44.93,34.15 45.11,34.33 45.11,39.58 44.93,39.76 44.78,39.76 44.64,39.9 44.64,41.75 42.55,43.84 40.45,43.84 29.08,43.84 25.45,40.21
H2: length 72.8
  TOP w0.203: v1(34.86,34.51) 34.86,35.15 33.62,36.39 U8.39 ; v1(31.31,6.32) 28.45,9.18 v1(28.45,21.24)
  BOTTOM w0.203: 31.31,4 v1(31.31,6.32) ; 31.31,4 K3.1 ; 31.31,4 K7.1 K11.1 ; v1(34.86,34.51) 36.02,34.51 37.86,32.67 37.86,30.4 32.96,25.5 32.96,24.23 29.97,21.24 v1(28.45,21.24)
H3: length 66.9
  TOP w0.203: v1(16.83,13.94) 18.35,13.94 19.24,14.83 v1(20,14.83) ; v1(33.72,34.64) 33.72,35.66 33.48,35.89 U8.40
  BOTTOM w0.203: K6.1 25.81,13.47 25.27,12.92 23.3,12.92 21.4,14.83 v1(20,14.83) ; K6.1 26.26,14.34 29.69,14.34 29.87,14.52 29.87,17.95 30.54,18.63 30.54,21.18 33.46,24.1 33.46,25.37 38.29,30.19 38.29,32.81 35.96,35.15 34.23,35.15 v1(33.72,34.64) ; K6.1 K2.1 ; v1(16.83,13.94) 15.94,13.94 15.9,13.9 K10.1
H4: length 68.8
  TOP w0.203: v1(30.92,35.02) 30.97,35.02 31.33,35.39 U8.41
  TOP w0.305: v1(19.88,19.78) 22.89,22.8 v1(25.81,22.8) 28.88,22.8 31.13,20.54 v1(31.69,20.54)
  BOTTOM w0.203: v1(30.92,35.02) 30.92,33.88 30.16,33.12 29.35,33.12 29.15,32.91 29.15,31.9 29.33,31.72 30.8,31.72 33.08,29.43 33.08,28.67 32.58,28.16 30.17,28.16 29.87,27.86 29.87,24.43 29.69,24.25 26.26,24.25 K5.1 v1(25.81,22.8) ; K1.1 44.61,23.8 44.81,23.6 44.81,22.27 44.61,22.07 40.39,22.07 38.8,22.07 36.26,19.53 33.59,19.53 33.54,19.58 32.65,19.58 v1(31.69,20.54) ; v1(19.88,19.78) 18.73,19.78 14.71,23.8 K9.1
IIC_SCL: length 47.3
  TOP w0.203: 8.45,39.27 8.45,40.07 9.48,41.1 10.4,41.1 10.41,41.12 11.62,41.12 13.02,39.72 13.02,34.89 14.77,33.15 21.68,33.15 22.82,34.28 22.82,34.66 v1(23.18,35.02) U10.6 ; v1(32.45,29.05) 32.45,29.81 33.18,30.55 36.6,30.55 36.78,30.37 U8.5 36.78,28.4 35,26.62 R33.2
  BOTTOM w0.203: v1(32.45,29.05) 31.31,30.19 31.31,30.58 30.67,31.21 26.35,31.21 23.76,33.81 23.76,34.44 v1(23.18,35.02)
IIC_SDA: length 46.7
  TOP w0.203: v1(31.18,29.05) 31.53,29.41 31.53,29.66 32.83,30.96 36.89,30.96 37.28,30.57 U8.6 37.28,27.91 34.95,25.58 R34.2 ; U10.5 v1(23.18,33.75) 22.17,32.74 14.54,32.74 12.51,34.77 12.51,39.47 11.37,40.61 9.97,40.61 9.72,40.35 U9.5
  BOTTOM w0.203: v1(31.18,29.05) 30.82,29.41 30.82,30.42 30.54,30.7 26.23,30.7 v1(23.18,33.75)
L1: length 79.3
  TOP w0.203: U8.35 35.28,38.85 36.31,37.82 v1(37.91,37.82)
  BOTTOM w0.203: 45.86,31.29 45.65,31.08 40.98,31.08 40.45,30.56 40.45,24.7 K1.2 ; 45.86,31.29 45.86,32.41 45.28,32.99 40.81,32.99 40.3,33.5 K4.2 39.37,34.45 38.54,35.27 38.54,37.19 v1(37.91,37.82) ; 45.86,31.29 45.86,27.45 48.07,25.24 48.07,21.05 ; K3.2 40.3,9.75 40.14,9.91 40.14,10.96 40.7,11.53 46.29,11.53 48.07,13.3 48.07,21.05 ; 48.07,21.05 47.82,20.8 40.96,20.8 40.45,20.29 40.45,14.79 K2.2 40.3,16.88 39.84,16.88 39.81,16.86 v1(39.8,16.86)
L2: length 57.2
  TOP w0.203: v1(24.57,39.34) 24.57,39.84 25.09,40.36 32.71,40.36 32.96,40.61 34.61,40.61 34.78,40.44 U8.36 ; v1(25.06,13.54) 25.06,5.2 v1(24.62,4.75)
  BOTTOM w0.203: 25.06,9.73 K7.2 v1(24.62,4.75) ; 25.06,36.24 25.06,38.34 24.57,38.83 v1(24.57,39.34) ; 25.06,36.24 K8.2 ; 25.06,36.24 24.86,36.44 23.33,36.44 22.6,35.71 22.6,33.44 24.9,31.14 24.9,29.71 25.06,29.55 K5.2 K6.2 v1(25.06,13.54)
L3: length 67.4
  TOP w0.203: U8.37 30.31,37.39 28.45,35.53 28.45,34.07 28.45,33.06 26.99,31.59 26.91,31.52 24.12,31.52 23.3,30.7 20.13,30.7 19.49,30.07 19.49,28.99 18.54,28.04 9.58,28.04 9.46,28.16 v1(8.95,28.16)
  BOTTOM w0.203: K11.2 9.67,9.79 9.46,10 9.46,14.44 K10.2 9.67,19.64 9.51,19.81 9.51,20.97 9.84,21.3 13.4,21.3 13.78,21.69 13.78,22.7 13.4,23.08 9.97,23.08 9.67,23.38 K9.2 9.67,27.45 v1(8.95,28.16) 8.95,33.74 K12.2
LEDG: length 38
  TOP w0.203: v1(31.43,42.26) 37.78,42.26 38.78,41.26 U8.28
  BOTTOM w0.203: R6.2 33.46,20.8 32.7,21.56 32.7,22.7 33.97,23.97 33.97,25.27 ; 38.8,32.45 38.8,32.88 36.12,35.55 36.05,35.55 32.08,39.53 32,39.53
  BOTTOM w0.254: 32,39.53 31.43,40.1 v1(31.43,42.26) ; 33.97,25.27 38.8,30.09 38.8,32.45
LEDR: length 45.2
  TOP w0.203: U8.27 39.28,41.53 37.96,42.84 31.12,42.84 30.47,42.19 22.09,42.19 20.89,40.99 20.89,38.96 20.38,38.45 v1(18.48,38.45)
  BOTTOM w0.305: v1(18.48,38.45) 17.92,37.89 17.92,21.48 18.61,20.8 R5.2
MOTOL: length 12
  TOP w0.203: U8.22 44.23,36.39 44.89,37.05 44.89,40.86 45.43,41.4 48.3,41.4 48.83,40.86 U2.6
MOTOR: length 10.6
  TOP w0.203: 47.56,39.4 47.56,40.73 47.3,40.99 45.66,40.99 45.3,40.63 45.3,36.88 45.28,36.86 45.28,36.8 44.37,35.89 U8.21
P1.4: length 26.1
  TOP w0.203: U10.3 21.14,35.02 21.37,35.25 21.37,40.84 22.26,41.72 23.46,41.72 23.5,41.68 32.24,41.68 32.39,41.83 37.58,41.83 38.28,41.13 U8.29
P3.6: length 3.4
  TOP w0.254: U8.43 30.65,34.39 30.63,34.37 C53.2 30.07,33.78 30.12,33.73 R32.2
RCARD_ADCN: length 28.5
  TOP w0.203: U8.14 44.11,32.39 44.15,32.43 44.63,32.43 45.07,31.98 45.07,30.14 45.4,29.81 C40.1 R21.2 45.45,27.15 45.86,26.73 46.31,26.73 49.47,23.58 49.47,22.57 49.85,22.19 51.34,22.19 52.13,21.4 52.13,12.67 51.37,11.91 R19.2
RCARD_CS: length 12.4
  TOP w0.203: U5.24 42.94,23.82 43.14,23.62 43.14,23.57 v1(43.5,23.21) ; U8.8 38.28,27.01 v1(37.78,26.51)
  BOTTOM w0.203: v1(43.5,23.21) 42.99,23.21 42.92,23.28 39.74,23.28 38.14,24.89 38.14,26.16 v1(37.78,26.51)
RCARD_RST: length 22.1
  TOP w0.203: v1(33.34,22.07) 34.09,21.32 U5.6 ; v1(44.39,31.85) 43.88,31.85 43.84,31.89 U8.13
  BOTTOM w0.203: v1(33.34,22.07) 33.34,22.7 34.48,23.84 34.48,25.16 40.91,31.59 43.63,31.59 43.88,31.85 v1(44.39,31.85)
RF_PWR: length 25.9
  TOP w0.203: U8.33 36.28,40.72 35.98,41.02 32.73,41.02 32.48,40.77 23.59,40.77 23.55,40.74 v1(23.05,40.74)
  BOTTOM w0.203: M1.4 13.79,42.51 13.86,42.59 22.09,42.59 23.05,41.62 v1(23.05,40.74)
RF_TX: length 31.9
  TOP w0.203: v1(22.16,40.74) 22.74,41.32 23.29,41.32 23.33,41.27 32.41,41.27 32.56,41.42 36.75,41.42 37.28,40.89 U8.31
  BOTTOM w0.203: v1(22.16,40.74) 21.53,41.37 8.83,41.37 M1.2
SET_KEY: length 47.8
  TOP w0.203: U8.3 35.78,28.19 34.92,27.34 30.99,27.34 30.42,26.77 30.42,25.37 29.91,24.86 20.26,24.86 19.37,25.75 19.37,26.26 18.45,27.17 13.8,27.17 12,25.37 3.08,25.37 2.25,26.19 J1.3 1.9,26.19 0.83,27.27 0.83,32.88 1.19,33.24 R35.2
SPI_MISO: length 4.9
  TOP w0.203: U8.9 38.78,26.87 38.56,26.66 U5.31
SPI_MOSI: length 4.9
  TOP w0.203: U5.30 39.06,26.58 39.28,26.8 U8.10
SPI_SCK: length 8.9
  TOP w0.203: U5.29 39.56,25.76 39.81,26.01 v1(39.81,26.51) ; v1(36.77,26.51) 37.78,27.52 U8.7
  BOTTOM w0.203: v1(36.77,26.51) 37.35,27.09 38.47,27.09 39.05,26.51 v1(39.81,26.51)
SWCLK: length 19
  TOP w0.203: 50.86,18.38 48.83,18.38 48.2,19.02 48.2,23.65 46.1,25.75 42.23,25.75 39.78,28.2 U8.11
SWDIO: length 15.9
  TOP w0.203: 50.86,20.92 49.47,20.92 48.83,21.56 48.83,23.59 46.27,26.16 42.51,26.16 40.28,28.39 U8.12
VC_BS_SIG: length 33.4
  TOP w0.203: U8.25 40.28,37.83 39.25,36.8 35.88,36.8 33.72,38.95 30.03,38.95 27.23,36.16 27.23,33.56 26.41,32.74 23.36,32.74 22.54,31.93 16.68,31.93 15.81,31.05 U4.3
VC_CT_RST: length 38.1
  TOP w0.203: U8.26 39.78,37.91 39.12,37.24 36.07,37.24 33.95,39.36 29.81,39.36 26.73,36.28 26.73,33.63 26.24,33.15 23.19,33.15 22.37,32.33 15.92,32.33 15.18,31.59 15.18,29.06 15.38,28.85 16.48,28.85 17.08,29.45 U4.2
VC_CT_SIG: length 31.2
  TOP w0.203: U8.24 40.41,37.39 39.31,36.29 35.75,36.29 33.49,38.55 30.26,38.55 27.64,35.93 27.64,33.39 26.58,32.33 23.52,32.33 22.71,31.52 18.82,31.52 18.35,31.05 U4.1
VOC_BAT: length 2.1
  TOP w0.762: Q2.3 U3.3
VOC_PWR_ON: length 63.8
  TOP w0.203: R10.2 13.05,14.86 13.35,15.16 13.35,22.12 11.75,23.72 8.7,23.72 8.45,23.97 v1(7.81,23.97) ; v1(7.81,28.92) 13.78,28.92 14.26,28.44 18.37,28.44 18.96,29.03 18.96,30.29 19.78,31.11 21.87,31.11 23.05,31.11 23.86,31.93 26.75,31.93 28.05,33.23 28.05,35.7 30.42,38.07 33.18,38.07 35.37,35.88 39.53,35.88 40.54,36.89 U8.23
  BOTTOM w0.203: v1(7.81,28.92) v1(7.81,23.97)
N452386: length 5.6
  TOP w0.508: R20.2 D8.1 R18.2 C38.1 R20.2
N452418: length 6.9
  TOP w0.508: R17.2 39.69,9.37 C31.1 39.81,10.76 C36.1 C34.1 43.62,10.76 43.75,10.64 43.75,11.91
N452474: length 2.8
  TOP w0.508: C39.1 R19.1 D8.2
N452564: length 5.3
  TOP w0.508: C33.1 40.64,13.3 ANT2.2 40.45,13.05 39.69,12.29 C29.1 40.96,11.91 C36.2
N452690: length 6.7
  TOP w0.203: U5.21 43,22.32 43.3,22.01 43.74,22.01 43.81,21.94 46.16,21.94 46.33,21.77 Y1.1 46.04,20.55 C41.2
N452714: length 4.4
  TOP w0.203: U5.22 43.07,22.82 43.26,22.63 43.74,22.63 44.15,23.04 Y1.3 44.73,24.26 C42.2
N453184: length 6.5
  TOP w0.203: U5.17 42.96,20.32 43.88,19.4 43.88,18.51 44.26,18.13 C21.2 45.02,17.65 46.04,16.63 R14.1
N453208: length 1.5
  TOP w0.203: R15.1 46.8,18.13 C21.1
N453216: length 6.5
  TOP w0.203: C23.2 R14.2 44.28,16.22 41.56,18.94 U5.16
N453232: length 22.4
  TOP w0.508: C25.2 38.54,11.78 C29.2 38.67,12.41 37.91,13.18 ANT1.2 37.72,13.3 C26.2 v1(34.73,13.3) ; 47.31,16.61 v1(47.31,13.43)
  BOTTOM w0.381: v1(34.73,13.3) 46.59,13.3 46.71,13.43 v1(47.31,13.43)
N453248: length 4.6
  TOP w0.229: 38.8,18.51 39.06,18.78 U5.11
  TOP w0.508: 38.8,18.51 37.91,17.62 ANT1.1
N453252: length 4.2
  TOP w0.508: R16.2 38.54,10.51 C31.2 37.4,10.64 C25.1 C27.2
N453288: length 4.4
  TOP w0.229: 40.2,18.51 40.06,18.64 U5.13
  TOP w0.508: ANT2.1 40.45,16.48 40.53,16.56 40.53,17.8 40.2,18.13 40.2,18.51
N458659: length 2.6
  BOTTOM w0.254: D4.1 20.81,10.75 20.05,10 R3.1
N458663: length 1.8
  BOTTOM w0.254: D3.1 36.14,31.26 35.88,31 R2.1
N458667: length 1.7
  BOTTOM w0.254: R1.1 20.64,31.09 20.8,31.25 D2.1
N458671: length 89.5
  TOP w0.305: v1(26.35,21.3) 24.75,21.3 24.49,21.05 v1(23.94,21.05)
  BOTTOM w0.203: 23.38,21.05 23.3,21.05 19.11,16.85 19.11,13.26 ; 23.38,21.05 v1(23.94,21.05) ; 23.38,21.05 23.18,21.25 23.18,29.18 21.78,30.58 21.78,32.5 21.29,32.99 19.35,32.99 19.1,32.73 D2.2
  BOTTOM w0.254: D5.2 34.37,12.2 33.39,13.18 26.23,13.18 25.54,12.49 22.85,12.49 21.53,13.81 19.36,13.81 19.13,13.58 19.13,13.29 19.11,13.26 19.11,13.08
  BOTTOM w0.305: Q1.3 36.03,40.38 35.43,39.78 32.51,39.78 32.07,40.23 32.07,42.52 31.69,42.89 31.17,42.89 30.8,42.52 30.8,41.24 30.92,41.12 30.92,38.96 32.96,36.93 32.96,32.35 33.34,31.97 34.4,31.97 D3.2 34.49,32.01 35.39,32.92 36.78,32.92 37.15,32.55 37.15,31.47 36.97,31.29 36.97,30.27 32.45,25.75 32.45,24.48 29.91,21.94 26.99,21.94 v1(26.35,21.3)
  BOTTOM w0.508: 19.11,13.08 D4.2
N458703: length 3
  BOTTOM w0.254: D5.1 36.12,10.26 36.51,9.87 R4.1
N554836: length 7
  TOP w0.254: Q6.3 25.45,25.99 24.75,25.29 22.65,25.29 21.81,26.14 Q5.1 21.44,25.97 R28.1
N554996: length 1.6
  TOP w0.203: R29.1 28.99,26.09 28.98,26.08 Q6.1
N555000: length 2.5
  TOP w0.762: R27.2 24.16,29.32 23.77,28.94 Q5.3
N555502: length 13.8
  TOP w0.635: J2.2 52.77,28.65 52.4,28.29 C6.2 48.2,29.03 48.71,29.55 49.33,29.55 49.34,29.56 50.1,29.56 50.72,30.17 50.72,32.78 50.1,33.4 50.1,34.2
N555506: length 14.1
  TOP w0.635: J2.1 52.82,26.65 52.2,27.27 C6.1 47.5,27.27 47.37,27.4 47.31,27.4 46.8,27.91 46.8,30.32 46.29,30.83 U2.1
N555509: length 5.4
  TOP w0.381: Q3.3 11.29,20.19 11.48,20 R9.1
  TOP w0.762: Q2.1 8.35,19.18 9.36,20.19 Q3.3
N555513: length 2.7
  TOP w0.381: R10.1 R11.1 9.56,16.54 9.53,16.57 Q3.1
N555834: length 6.8
  BOTTOM w0.254: Q1.1 33.63,40.8 34.8,41.96 34.8,42.32 35.37,42.89 R7.1 R8.1
N556154: length 1.4
  BOTTOM w0.254: D6.1 20.64,21.92 R5.1
N556230: length 1.4
  BOTTOM w0.254: R6.1 36.14,21.06 D7.1
N556926: length 5.3
  TOP w0.203: U5.32 38.06,25.09 37.78,25.37 36,25.37 35.5,24.86 34.48,24.86 33.85,24.23
N559129: length 4.8
  TOP w0.203: C51.2 17.02,38.7 16.66,38.35 X1.2 17.89,37.64 17.97,37.56 U10.1
N559153: length 3.6
  TOP w0.203: U10.2 18.31,36.29 17.16,35.14 X1.1
N566757: length 12.3
  TOP w0.203: U9.7 7.18,40.48 v1(6.67,40.99)
  TOP w0.254: R31.2 2.08,40.5 1.65,40.93 1.65,41.11 1.5,41.26 1.5,42.03 1.7,42.22 1.7,42.22 1.97,42.49 v1(1.97,43.02)
  BOTTOM w0.254: v1(1.97,43.02) 2.73,43.78 5.94,43.78 6.41,43.31 6.41,41.77 6.67,41.52 v1(6.67,40.99)

## Copper pours and planes (outline as drawn; the poured copper is in the pictures)
+3.3V on TOP (solid shape): 2.22,11.78 4.64,11.78 5.14,11.27 5.14,10.51 5.4,10.26 5.4,7.84 5.27,7.72 4.38,7.72 4.25,7.84 4.25,9.24 4.25,9.24 4.25,9.27 2.83,9.27 2.6,9.49 2.6,10.76 2.48,10.89 0.32,10.89 0.25,10.95 0.25,11.97 0.44,12.16 1.84,12.16
GND on TOP (solid shape): 41.82,33.69 40.34,33.69 38.32,31.67 33.91,31.67 33.81,31.73 33.84,31.84 36.03,34.03 41.82,34.03
GND on TOP (solid shape): 2.35,10.66 1.13,10.66 1.13,9.6 2.35,9.6 2.35,9.52 2.48,9.52 2.48,9.44 2.49,9.33 2.4,9.27 0.25,9.27 0.25,10.76 2.35,10.76
GND on TOP (solid shape): 31.3,33.06 31.38,33.06 31.38,32.72 31.3,32.72 31.3,32.25 30.39,32.25 30.26,32.38 30.26,32.4 30.23,32.51 30.18,32.61 30.18,32.72 30.27,32.77 30.63,32.77 30.63,33.68 30.45,33.68 30.45,33.91 30.58,33.91 30.58,34.04 30.76,34.04 30.79,34.06 31.3,34.06
GND on TOP (solid shape): 33.23,37.35 33.29,37.44 33.4,37.42 35.24,35.58 39.66,35.58 40.67,36.58 41.82,36.58 41.82,35.06 41.9,35.06 41.9,34.75 35.73,34.75 35.51,34.52 35.4,34.49 35.34,34.58 35.28,34.74 35.17,34.88 35.17,35.27 33.75,36.69 33.23,36.69
GND on TOP (solid shape): 33.03,21.52 33.08,21.61 33.17,21.62 33.26,21.59 33.36,21.59 33.38,21.59 33.96,21.01 36.71,21.01 36.71,19.99 37.74,19.99 37.74,19.6 37.73,19.57 37.73,19.18 37.39,18.84 37.34,18.84 37.32,18.85 37.18,18.94 37.02,18.97 36.4,18.97 36.39,18.97 36.26,18.99 36.12,18.97 36.12,18.97 33.03,18.97
GND on TOP (solid shape): 29.92,36.57 30.02,36.59 30.09,36.53 30.45,36.2 30.91,36.37 31.17,36.37 31.22,36.41 31.27,36.42 31.3,36.38 31.3,35.69 31.21,35.69 31.01,35.49 30.98,35.5 30.58,35.35 30.45,34.94 30.43,34.86 30.35,34.82 29.57,34.82 29.57,34.74 28.76,34.74 28.76,35.4
GND on TOP (solid shape): 41.82,31.56 43.74,31.56 43.76,31.54 44.02,31.54 44.3,31.38 44.62,31.43 44.72,31.42 44.77,31.34 44.77,30.02 45.1,29.69 45.1,28.74 44.9,28.74 44.9,28.67 43.96,28.67 43.96,27.91 44.9,27.91 44.9,27.84 45.1,27.84 45.1,27.6 44.9,27.6 44.9,27.52 43.96,27.52 43.96,26.77 44.9,26.77 44.9,26.69 45.47,26.69 45.53,26.63 45.56,26.52 45.46,26.46 42.64,26.46 40.61,28.49 40.61,30.34 37.58,30.34 37.58,30.7 37.4,30.88 37.37,31 37.47,31.06 38.57,31.06 40.6,33.08 41.82,33.08
GND on TOP (solid shape): 32.58,27.03 32.68,26.97 32.66,26.86 32.12,26.32 32.12,21.02 32.06,20.93 31.96,20.94 31.66,21.02 31.38,20.91 31.37,20.9 31.28,20.9 29.03,23.15 26.13,23.15 25.81,23.27 25.49,23.15 22.74,23.15 19.85,20.26 19.83,20.26 19.58,20.16 19.42,19.94 19.35,19.88 19.26,19.9 18.81,20.35 18.81,23.75 18.85,23.75 18.85,26.09 18.92,26.19 19.03,26.17 19.06,26.13 19.06,25.62 20.13,24.56 30.03,24.56 30.72,25.24 30.72,26.64 31.11,27.03
GND on TOP (solid shape): 34.02,35.31 34.09,35.4 34.2,35.38 34.56,35.02 34.56,34.88 34.4,34.38 34.8,34.04 34.88,33.97 34.85,33.87 33.4,32.42 33.29,32.39 33.23,32.49 33.23,32.72 33.16,32.72 33.16,33.06 33.23,33.06 33.23,34.21 33.29,34.3 33.4,34.28 34.08,34.33 34.02,35.01
GND on TOP (solid shape): 50.19,32.57 50.19,30.39 49.89,30.08 49.12,30.08 49.11,30.07 48.5,30.07 47.68,29.25 47.68,28.29 47.69,28.16 47.74,28.04 47.74,28.03 47.74,27.89 47.71,27.84 47.66,27.86 47.59,27.92 47.52,27.92 47.32,28.12 47.32,30.54 46.81,31.05 46.81,31.9 47.05,31.9 47.06,31.89 47.31,31.83 47.56,31.9 47.81,31.9 47.81,31.98 48.75,31.98 48.75,32.3 48.81,32.4 48.92,32.38 49.12,32.18 49.12,32.17 49.69,31.76 50.05,32.36 50.05,32.37 50.05,32.54 49.78,32.81 49.77,32.86 49.82,32.9 49.87,32.9
GND on TOP (solid shape): 53.52,22.36 53.52,10.73 52.9,10.11 50.65,10.11 45.03,4.49 37.36,4.49 37.36,6.64 37.46,6.75 39.75,6.75 40.27,7.27 40.27,8.22 40.27,8.28 40.27,9.18 40.27,9.24 40.27,9.3 40.27,9.74 40.14,9.74 40.14,10.18 40.19,10.18 40.19,10.31 40.63,10.31 40.63,10.26 41.54,10.26 41.54,10.31 41.9,10.31 41.9,10.26 42.81,10.26 42.81,10.31 43.25,10.31 43.25,10.18 43.69,10.18 43.75,10.18 43.81,10.18 44.71,10.18 44.77,10.18 46.29,10.18 46.35,10.18 46.79,10.18 46.79,10.26 47.73,10.26 47.73,11.01 46.79,11.01 46.79,11.09 46.75,11.09 46.75,11.45 47.25,11.45 47.31,11.45 48.37,11.45 48.37,11.09 48.33,11.09 48.33,10.18 48.77,10.18 48.83,10.18 48.89,10.18 49.33,10.18 49.33,10.26 50.27,10.26 50.27,11.01 49.33,11.01 49.33,11.09 49.29,11.09 49.29,11.45 50.35,11.45 50.35,11.6 51.5,11.6 52.44,12.54 52.44,21.53 51.68,22.29 51.66,22.4 51.75,22.46 51.87,22.46 51.87,22.94 52.93,22.94
GND on TOP (solid shape): 6.88,25.85 6.9,25.74 6.81,25.67 3.21,25.67 3.03,25.85 3.05,25.88 2.96,26.67 2.25,27.05 1.9,27.05 1.74,27.03 1.59,26.99 1.56,26.97 1.13,27.4 1.13,27.63 1.2,27.72 1.31,27.69 1.58,27.49 1.9,27.42 2.25,27.42 3.03,28.19 2.25,28.97 1.9,28.97 1.58,28.9 1.31,28.69 1.2,28.66 1.13,28.76 1.13,29.34 3.11,29.34 3.11,29.48 3.24,29.48
GND on TOP (solid shape): outline of 248 points within 0.25,0.25 54.99,9.07
GND on TOP (solid shape): outline of 270 points within 18.87,25.17 34.73,32.77
GND on TOP (solid shape): outline of 165 points within 33.03,4.49 45.25,19.04
GND on TOP (solid shape): outline of 154 points within 39.58,12.21 51.83,27.81
GND on TOP (solid shape): outline of 386 points within 0.25,11.91 13.41,43.94
GND on TOP (solid shape): outline of 751 points within 4.25,2.52 32.12,26.16
GND on TOP (solid shape): outline of 1205 points within 1.13,9.27 54.99,43.94
GND on BOTTOM (solid shape): 47.76,13.89 47.71,13.8 47.6,13.81 47.32,13.91 47.04,13.82 46.55,13.82 46.42,13.7 45.75,13.7 45.75,20.49 47.76,20.49
GND on BOTTOM (solid shape): 18.63,16.74 18.74,16.76 18.8,16.67 18.8,13.42 18.78,13.4 18.68,13.26 18.65,13.08 18.65,12.9 18.35,12.9 18.35,11.5 19.86,11.5 19.86,12.9 19.82,12.9 19.73,12.97 19.75,13.08 20.15,13.48 21.21,13.48 22.91,11.78 20.47,9.34 19.53,9.34 19.44,9.43 19.44,9.55 20.51,9.55 20.51,9.99 21.14,10.62 21.14,11.5 21.56,11.5 21.56,12.9 20.05,12.9 20.05,11.5 20.48,11.5 20.48,10.89 20.04,10.45 19.05,10.45 18.99,10.46 18.41,10.46 18.05,10.83 18.05,16.16
GND on BOTTOM (solid shape): 20.04,31.3 20.29,31.3 20.32,31.24 20.31,31.23 20.31,30.77 19.68,30.77 19.62,30.78 19.56,30.77 19.12,30.77 19.12,29.87 19.16,29.87 19.16,29.75 19.81,29.1 21.59,29.1 22.08,28.61 22.08,21.49 21.31,20.72 21.2,20.7 21.14,20.79 21.14,21.25 20.97,21.25 20.97,21.4 21.58,21.4 21.58,22.81 20.07,22.81 20.07,21.4 20.31,21.4 20.31,21.25 19.12,21.25 19.12,21.15 18.75,21.15 18.6,21.3 18.58,21.41 18.67,21.48 19.8,21.48 19.8,22.73 18.45,22.73 18.45,21.58 18.41,21.53 18.36,21.55 18.27,21.63 18.27,31.3 19.85,31.3 19.85,32.68 20.04,32.68
GND on BOTTOM (solid shape): 10.22,24.03 10.13,23.69 10.42,23.5 14.58,23.5 18.61,19.48 19.51,19.48 19.6,19.39 19.72,19.33 19.78,19.26 19.75,19.16 17.13,16.54 17.13,14.48 17.09,14.4 16.99,14.39 16.7,14.4 16.46,14.24 15.82,14.24 15.77,14.2 15.12,14.2 15.12,20.6 13.47,20.6 13.4,20.67 13.4,20.92 13.47,21 13.52,21 14.08,21.56 14.08,22.83 13.52,23.39 10.1,23.39 9.97,23.51 9.97,24.35 10.22,24.35
GND on BOTTOM (solid shape): 34.41,34.84 34.46,34.82 34.46,34.77 34.58,34.12 35.23,34.21 35.89,34.21 36.65,33.45 36.67,33.34 36.58,33.27 35.24,33.27 34.69,32.71 33.68,32.71 33.68,32.33 33.48,32.33 33.31,32.5 33.31,34.15 33.36,34.23 33.47,34.23 33.96,34.23 34.2,34.66 34.19,34.69 34.35,34.84
GND on BOTTOM (solid shape): 34.36,29.87 35.82,29.87 35.91,29.81 35.89,29.69 32.09,25.9 32.09,25.01 32.07,24.98 32.07,24.6 29.76,22.3 26.84,22.3 26.33,21.78 26.31,21.78 26.1,21.71 25.95,21.56 25.46,21.56 25.37,21.66 25.37,22.33 25.42,22.42 25.53,22.41 26.19,22.5 26.12,23.16 26.12,23.6 30.51,23.6 30.51,27.86 32.7,27.86 33.39,28.54 33.39,29.56 33.15,29.79 33.13,29.9 33.23,29.97 34.36,29.97
GND on BOTTOM (solid shape): 5.32,2.52 7.41,0.43 7.44,0.32 7.34,0.25 0.25,0.25 0.25,4.83 4.25,4.83 4.25,9.27 0.25,9.27 0.25,15.47 0.32,15.56 0.43,15.54 3.67,12.3 3.67,10.64 4.25,10.05 4.84,10.64 4.84,12.78 1.32,16.3 1.32,16.35 1.37,16.44 1.48,16.43 2.06,16.28 2.59,16.55 5.32,16.55
GND on BOTTOM (solid shape): outline of 88 points within 26.33,34.76 44.34,43.54
GND on BOTTOM (solid shape): 30.51,38.62 30.58,38.71 30.69,38.69 32.6,36.78 32.6,32.21 33.19,31.62 33.68,31.62 33.68,31.31 35.19,31.31 35.19,32.21 35.21,32.23 35.32,32.25 35.38,32.16 35.38,31.31 35.48,31.31 35.57,31.25 35.55,31.13 35.55,30.77 34.36,30.77 34.36,30.68 33.1,30.68 31.07,32.71 30.43,32.71 30.34,32.77 30.36,32.88 31.23,33.75 31.23,34.65 31.31,35.3 30.67,35.43 30.57,35.42 30.51,35.51 30.51,35.96 30.85,36.29 30.85,36.3 30.86,36.32 30.99,36.83 30.56,37.15 30.53,37.16 30.51,37.2
GND on BOTTOM (solid shape): 37.46,41.38 37.6,41.38 37.6,38.95 37.43,38.6 37.57,38.24 37.59,38.2 37.57,38.16 37.47,37.63 37.93,37.35 37.95,37.35 38.24,37.06 38.24,35.15 39.24,34.15 40,34.15 40,33.37 40.68,32.68 45.15,32.68 45.55,32.28 45.55,31.41 45.53,31.39 44.84,31.39 44.75,31.45 44.76,31.55 44.69,32.22 44.02,32.15 43.76,32.15 43.5,31.9 40.78,31.9 39.3,30.42 39.19,30.39 39.13,30.49 39.13,32.45 39.12,32.51 39.1,32.57 39.1,33.01 36.25,35.86 36.18,35.86 32.78,39.25 32.76,39.36 32.86,39.43 35.58,39.43 36.39,40.24 36.39,41.05 36.94,41.05 36.94,42.45 35.52,42.45 35.47,42.49 35.48,42.54 35.51,42.56 37.46,42.56
GND on BOTTOM (solid shape): 28.5,43.94 28.6,43.88 28.57,43.77 25.32,40.52 25.07,40.52 24.96,40.41 23.58,40.41 23.5,40.45 23.49,40.55 23.52,40.85 23.36,41.1 23.36,41.75 22.22,42.89 13.69,42.89 12.23,43.37 12.02,41.84 12.03,41.74 11.94,41.68 10.94,41.68 10.85,41.74 10.87,41.85 10.22,43.44 9.58,41.85 9.6,41.74 9.51,41.68 8.95,41.68 8.57,42.05 8.24,43.35 6.92,43.17 6.81,43.14 6.74,43.23 6.74,43.45 6.42,43.77 6.4,43.88 6.49,43.94
GND on BOTTOM (solid shape): outline of 250 points within 9.77,4.31 47.19,13.63
GND on BOTTOM (solid shape): outline of 265 points within 1.32,17.71 15.19,41.68
GND on BOTTOM (solid shape): outline of 289 points within 0.25,20.43 5.57,43.94
GND on BOTTOM (solid shape): outline of 119 points within 30.51,14.2 47.76,26.97
GND on BOTTOM (solid shape): outline of 457 points within 9.26,13.23 24.76,40.63
GND on BOTTOM (solid shape): outline of 680 points within 6.49,0.25 54.99,43.94
VCC on TOP (solid shape): 12.89,22.07 12.89,21.69 12.76,21.56 7.3,21.56 6.92,21.18 6.92,20.29 6.54,19.91 6.54,18.76 4.13,16.35 4.13,13.3 4.38,13.05 4.38,12.16 3.11,12.16 2.73,12.54 2.73,16.22 2.6,16.35 1.71,16.35 1.33,16.73 1.33,17.62 1.46,17.75 4,17.75 5.27,19.02 5.27,20.16 5.52,20.16 5.91,20.54 5.91,22.07 7.18,23.34 11.62,23.34
GND on TOP (solid shape): 48.31,34.2 48.31,34.13 48.33,34.06 48.33,32.9 48.4,32.9 48.48,32.82 48.49,32.76 48.45,32.73 48.08,32.73 48.08,35.26 48.31,35.26

## Text on the board
Ref Des/Silkscreen Top: 18-01-30 | OMNI902_V0.1
User.7: ZONE1-2
